# EAGLE board irboard (EAGLE 9.5.1)
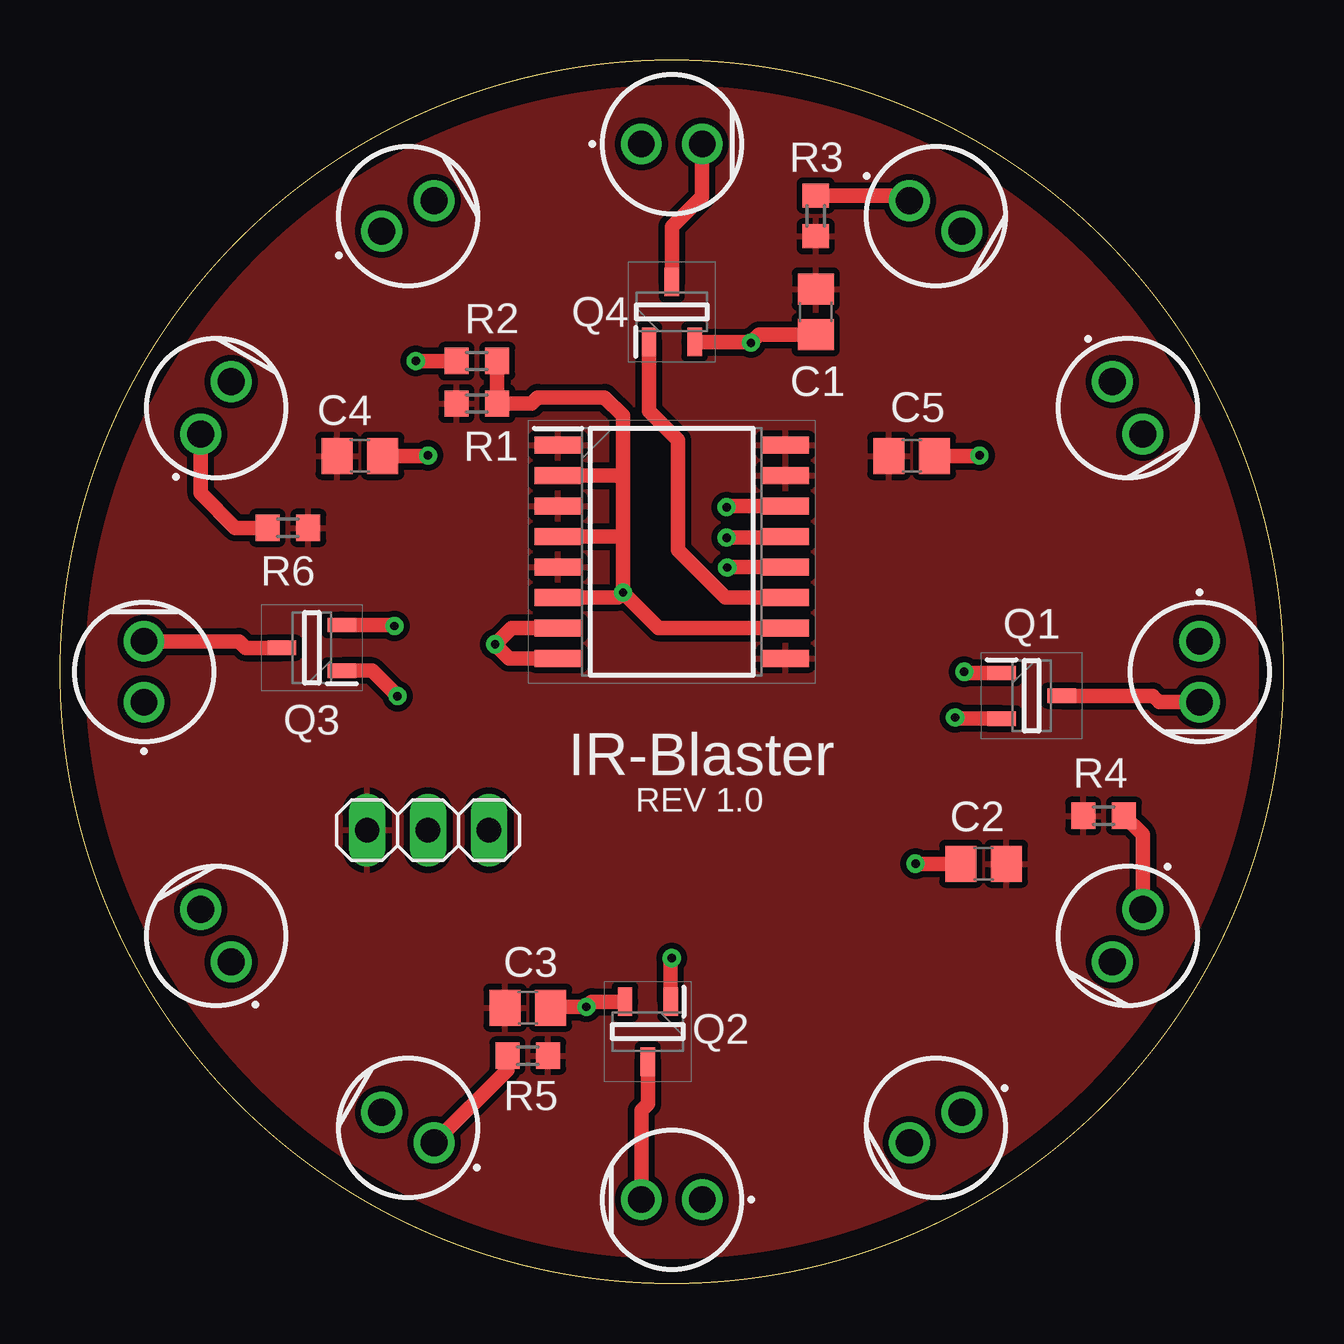
[diagram p0: board, top side]
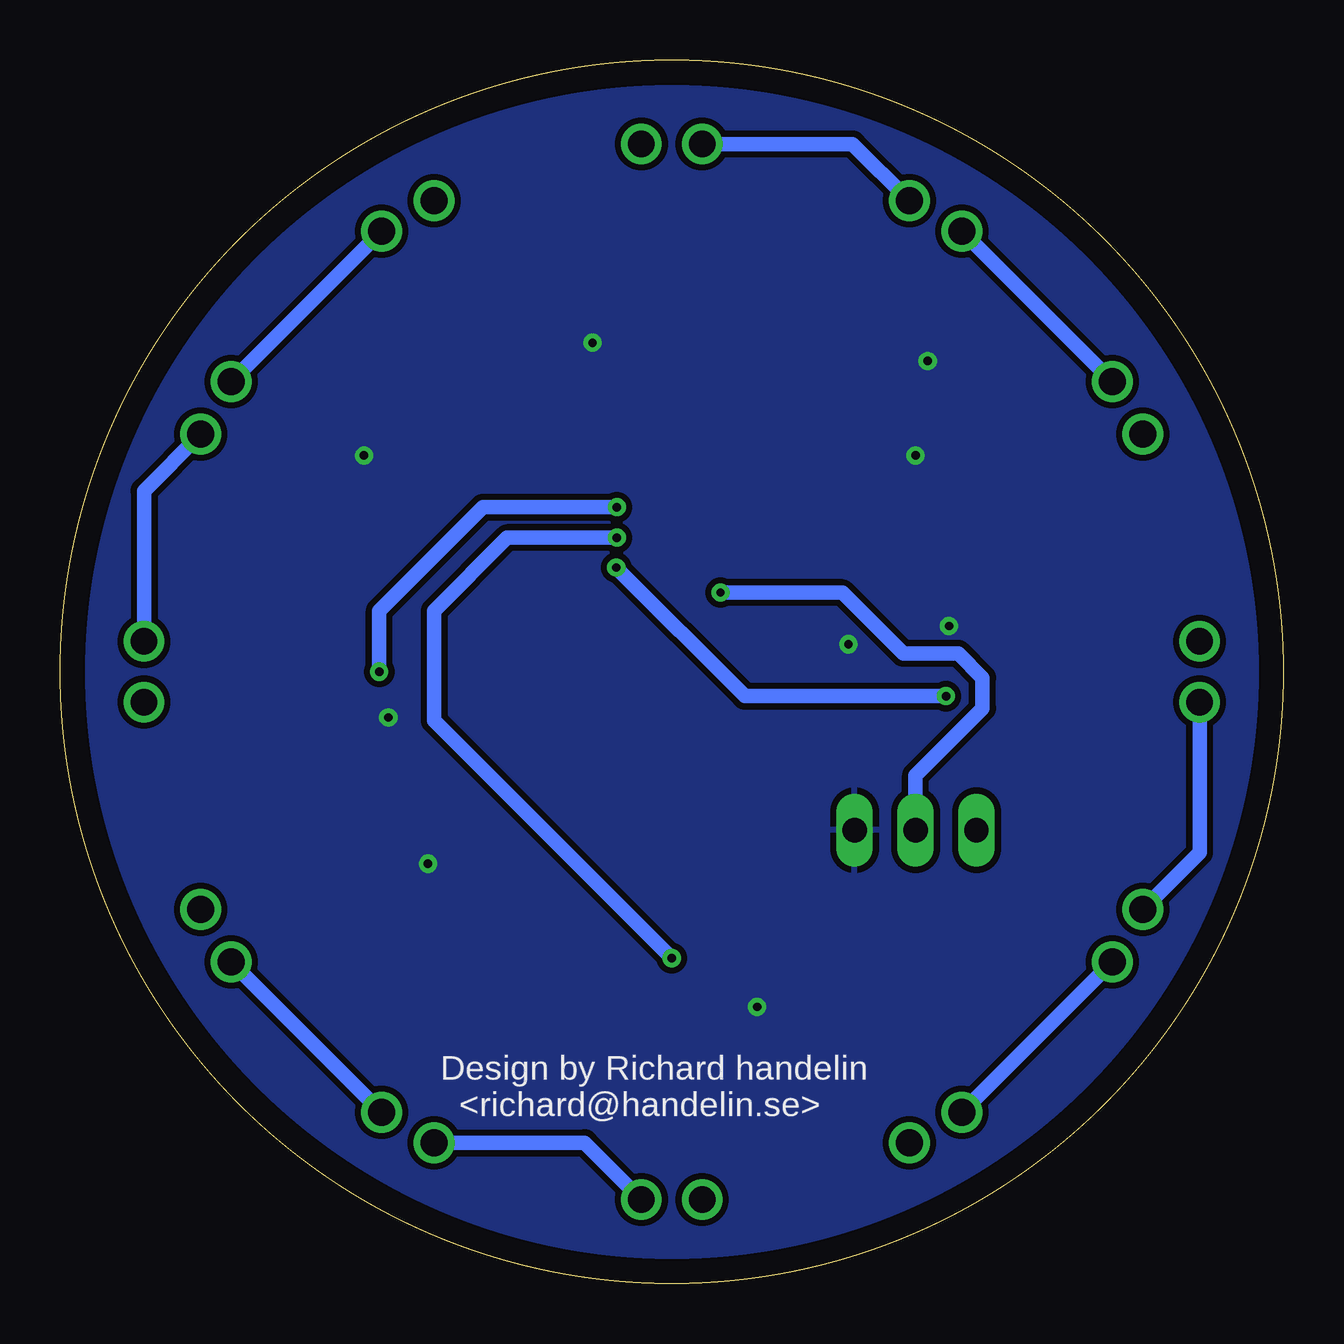
[diagram p1: board, bottom side, seen from below]

Size 51 x 51 mm. Coordinates in mm from the lower left corner, seen from the top.
Outline: circle at 25.5,25.5 radius 25.5
Copper layers (1*16): Top 0.035mm / dielectric 1.5mm / Bottom 0.035mm
Design rules "default *": minimum track width 6mil, minimum drill 0.35mm, track to track 10mil, track to pad 10mil, pad to pad 10mil, via to via 10mil, smd to smd 10mil, copper to edge 40mil, drill to drill 6mil, minimum pad ring 10mil, minimum via ring 8mil, stop-mask expansion 4mil, vias tented up to drill 0mil, thermal gap 10mil

## Footprints (pad centres in the part's own frame; a part is rotated, then mirrored left to right if it is on the bottom)
C0805 = smd 1.3 x 1.5: 1 -0.95,0; 2 0.95,0
SOIC127P1034X264-16N = smd 1.98 x 0.7: 1 -4.735,4.445; 2 -4.735,3.175; 3 -4.735,1.905; 4 -4.735,0.635; 5 -4.735,-0.635; 6 -4.735,-1.905; 7 -4.735,-3.175; 8 -4.735,-4.445; 9 4.735,-4.445; 10 4.735,-3.175; 11 4.735,-1.905; 12 4.735,-0.635; 13 4.735,0.635; 14 4.735,1.905; 15 4.735,3.175; 16 4.735,4.445
1X03 = drill 1.016 long: 1 -2.54,0; 2 0,0; 3 2.54,0
TSAL6100 = drill 1.12 pad 1.7: 1 -1.27,0; 2 1.27,0
SOT95P280X125-3N = smd 1.2 x 0.6: 1 -1.25,0.95; 2 -1.25,-0.95; 3 1.25,0
R0603 = smd 1 x 1.1: 1 -0.85,0; 2 0.85,0

## Placement (x,y rotation side)
C1  22u  [C0805]  31.5,40.5 270 top
C2  22u  [C0805]  38.5,17.5 180 top
C3  22u  [C0805]  19.5,11.5 0 top
C4  22u  [C0805]  12.5,34.5 0 top
C5  22u  [C0805]  35.5,34.5 0 top
IC1  TC4469COE  [SOIC127P1034X264-16N]  25.5,30.5 0 top
JP1  [1X03]  15.34,18.9 180 top
LED1  TSAL6400  [TSAL6100]  36.5,44.5 330 top
LED2  TSAL6400  [TSAL6100]  44.5,36.5 300 top
LED3  TSAL6400  [TSAL6100]  47.5,25.5 270 top
LED4  TSAL6400  [TSAL6100]  44.5,14.5 240 top
LED5  TSAL6400  [TSAL6100]  36.5,6.5 210 top
LED6  TSAL6400  [TSAL6100]  25.5,3.5 180 top
LED7  TSAL6400  [TSAL6100]  14.5,6.5 150 top
LED8  TSAL6400  [TSAL6100]  6.5,14.5 120 top
LED9  TSAL6400  [TSAL6100]  3.5,25.5 90 top
LED10  TSAL6400  [TSAL6100]  6.5,36.5 60 top
LED11  TSAL6400  [TSAL6100]  14.5,44.5 30 top
LED12  TSAL6400  [TSAL6100]  25.5,47.5 0 top
Q1  AO3400A  [SOT95P280X125-3N]  40.5,24.5 0 top
Q2  AO3400A  [SOT95P280X125-3N]  24.5,10.5 270 top
Q3  AO3400A  [SOT95P280X125-3N]  10.5,26.5 180 top
Q4  AO3400A  [SOT95P280X125-3N]  25.5,40.5 90 top
R1  10k  [R0603]  17.37,36.68 180 top
R2  10k  [R0603]  17.37,38.45 0 top
R3  2R2  [R0603]  31.5,44.5 270 top
R4  2R2  [R0603]  43.5,19.5 180 top
R5  2R2  [R0603]  19.5,9.5 0 top
R6  2R2  [R0603]  9.5,31.5 0 top

## Library data of the parts
C1-C5 R1-R6 = irblaster
IC1 = irblaster; ALLIED_NUMBER: 70046884; ALLIED_PRICE-STOCK: https://www.alliedelec.com/microchiptechnologyinc-tc4469coe/70046884/; DESCRIPTION: TC4469COE, Quad MOSFET Power Driver 1.2A, 4.5 to 18V, 16-Pin SOIC W; HEIGHT: 2.64mm; MANUFACTURER_NAME: Microchip; MANUFACTURER_PART_NUMBER: TC4469COE; MOUSER_PART_NUMBER: 579-TC4469COE; MOUSER_PRICE-STOCK: https://www.mouser.com/Search/Refine.aspx?Keyword=579-TC4469COE; RS_PART_NUMBER: 6684411P; RS_PRICE-STOCK: http://uk.rs-online.com/web/p/products/6684411P
JP1 = pinhead
LED1-LED12 = irblaster; ALLIED_NUMBER: 70026434; ALLIED_PRICE-STOCK: https://www.alliedelec.com/siliconix-vishay-tsal6400/70026434/; DESCRIPTION: Vishay TSAL6400 IR LED, 940nm, 2-Pin Through Hole 5mm, 5mm; HEIGHT: mm; MANUFACTURER_NAME: Vishay; MANUFACTURER_PART_NUMBER: TSAL6400; MOUSER_PART_NUMBER: 782-TSAL6400; MOUSER_PRICE-STOCK: https://www.mouser.com/Search/Refine.aspx?Keyword=782-TSAL6400; RS_PART_NUMBER: 8187672; RS_PRICE-STOCK: https://uk.rs-online.com/web/p/products/8187672
Q1-Q4 = irblaster; DESCRIPTION: 30V N-Channel MOSFET; HEIGHT: 1.25mm; MANUFACTURER_NAME: Alpha & Omega Semiconductors; MANUFACTURER_PART_NUMBER: AO3400A

## Nets
GATE1: IC1.14 Q1.1
GATE2: IC1.13 Q2.1
GATE3: IC1.12 Q3.1
GATE4: IC1.11 Q4.1
GND: C1.2 C2.2 C3.2 C4.2 C5.2 IC1.7 IC1.8 JP1.1 Q1.2 Q2.2 Q3.2 Q4.2 R2.1
N$1: LED3.2 Q1.3
N$2: LED2.2 LED3.1
N$3: LED1.2 LED2.1
N$4: LED4.2 LED5.1
N$5: LED5.2 LED6.1
N$6: LED6.2 Q2.3
N$7: LED7.2 LED8.1
N$8: LED8.2 LED9.1
N$9: LED9.2 Q3.3
N$10: LED10.2 LED11.1
N$11: LED11.2 LED12.1
N$12: LED12.2 Q4.3
N$13: LED1.1 R3.1
N$15: LED4.1 R4.1
N$17: LED7.1 R5.1
N$20: LED10.1 R6.1
SIGNAL: IC1.2 IC1.4 IC1.6 IC1.10 JP1.2 R1.1 R2.2
VIN: C1.1 C2.1 C3.1 C4.1 C5.1 IC1.1 IC1.3 IC1.5 IC1.9 IC1.15 IC1.16 JP1.3 R1.2 R3.2 R4.2 R5.2 R6.2

## Tracks (layer width: path | path; a pad name or v marks a point on that pad's centre or on a via)
GATE1  (via drill 0.35)
  Top 0.61: Q1.1 37.74,25.45 v37.69,25.5 | v27.79,32.36 27.83,32.41 IC1.14
  Bottom 0.61: v37.69,25.5 37.69,28.04 33.37,32.36 v27.79,32.36
GATE2  (via drill 0.35)
  Top 0.61: Q2.1 25.45,13.51 v25.5,13.56 | v27.79,31.09 30.19,31.09 IC1.13
  Bottom 0.61: v27.79,31.09 32.36,31.09 35.41,28.04 35.41,23.47 v25.5,13.56
GATE3  (via drill 0.35)
  Top 0.61: IC1.12 27.83,29.87 v27.81,29.85 | v14.07,24.48 13,25.55 Q3.1
  Bottom 0.61: v27.81,29.85 22.45,24.48 v14.07,24.48
GATE4
  Top 0.61: IC1.11 27.74,28.59 25.75,30.58 25.75,35.15 24.55,36.36 Q4.1
GND  (via drill 0.35)
  Top 0.61: Q3.2 13.9,27.45 v13.94,27.41 | IC1.8 18.72,26.05 v18.13,26.64 18.82,27.32 IC1.7 | C4.2 15.32,34.5 v15.34,34.52 | Q4.2 28.77,39.25 v28.8,39.22 29.14,39.55 C1.2 | C5.2 38.31,34.5 v38.33,34.52 | C2.2 v35.66,17.5 | Q1.2 37.36,23.55 v37.31,23.59 | C3.2 20.48,11.53 v21.94,11.53 22.16,11.75 Q2.2 | R2.1 v14.83,38.45
  pour Bottom: 25.5,50.5 arc-90 50.5,26.5 arc-90 25.5,0.5 arc-90 0.5,25.5 arc-90
N$1
  Top 0.61: Q1.3 45.55,24.5 45.82,24.23 LED3.2
N$2
  Bottom 0.61: LED2.2 47.5,33.03 LED3.1
N$3
  Bottom 0.61: LED1.2 LED2.1
N$4
  Bottom 0.61: LED4.2 LED5.1
N$5
  Bottom 0.61: LED5.2 29.13,5.86 LED6.1
N$6
  Top 0.61: LED6.2 24.23,7.21 24.5,7.48 Q2.3
N$7
  Bottom 0.61: LED7.2 LED8.1
N$8
  Bottom 0.61: LED8.2 3.5,17.96 LED9.1
N$9
  Top 0.61: LED9.2 7.47,26.77 7.74,26.5 Q3.3
N$10
  Bottom 0.61: LED10.2 LED11.1
N$11
  Bottom 0.61: LED11.2 17.96,47.5 LED12.1
N$12
  Top 0.61: Q4.3 25.5,44.04 26.77,45.31 LED12.2
N$13
  Top 0.61: R3.1 35.19,45.35 LED1.1
N$15
  Top 0.61: R4.1 45.14,18.71 LED4.1
N$17
  Top 0.61: LED7.1 18.65,8.91 R5.1
N$20
  Top 0.61: R6.1 7.31,31.5 5.86,32.94 LED10.1
SIGNAL  (via drill 0.35)
  Top 0.61: IC1.6 23.26,28.59 v23.47,28.8 | 23.47,31.09 v23.47,28.8 | 23.47,31.09 23.47,33.63 | 23.47,33.63 23.47,36.17 22.71,36.93 19.91,36.93 19.66,36.68 R1.1 R2.2 | IC1.2 23.42,33.67 23.47,33.63 | IC1.4 23.42,31.13 23.47,31.09 | v23.47,28.8 24.95,27.32 IC1.10
  Bottom 0.61: JP1.2 15.34,21.18 12.55,23.98 12.55,25.25 13.56,26.26 15.85,26.26 18.39,28.8 v23.47,28.8
VIN
  pour Top: 25.5,50.5 arc-90 50.5,26.5 arc-90 25.5,0.5 arc-90 0.5,25.5 arc-90

## Text on the board
tPlace: IR-Blaster | REV 1.0
bPlace: Design by Richard handelin / <richard@handelin.se>
tValues: VIN | SIG | GND
bValues: VIN | SIG | GND